# Altium PCB PCB2.PcbDoc
Units mil, origin at the board's own origin, x right, y up, seen from the top; angles counter-clockwise.
Board outline 3932.54 x 3937.16 mil, 2 copper layers (Top Layer, Bottom Layer); 48 components, 43 nets, 184 pads, 106 vias.
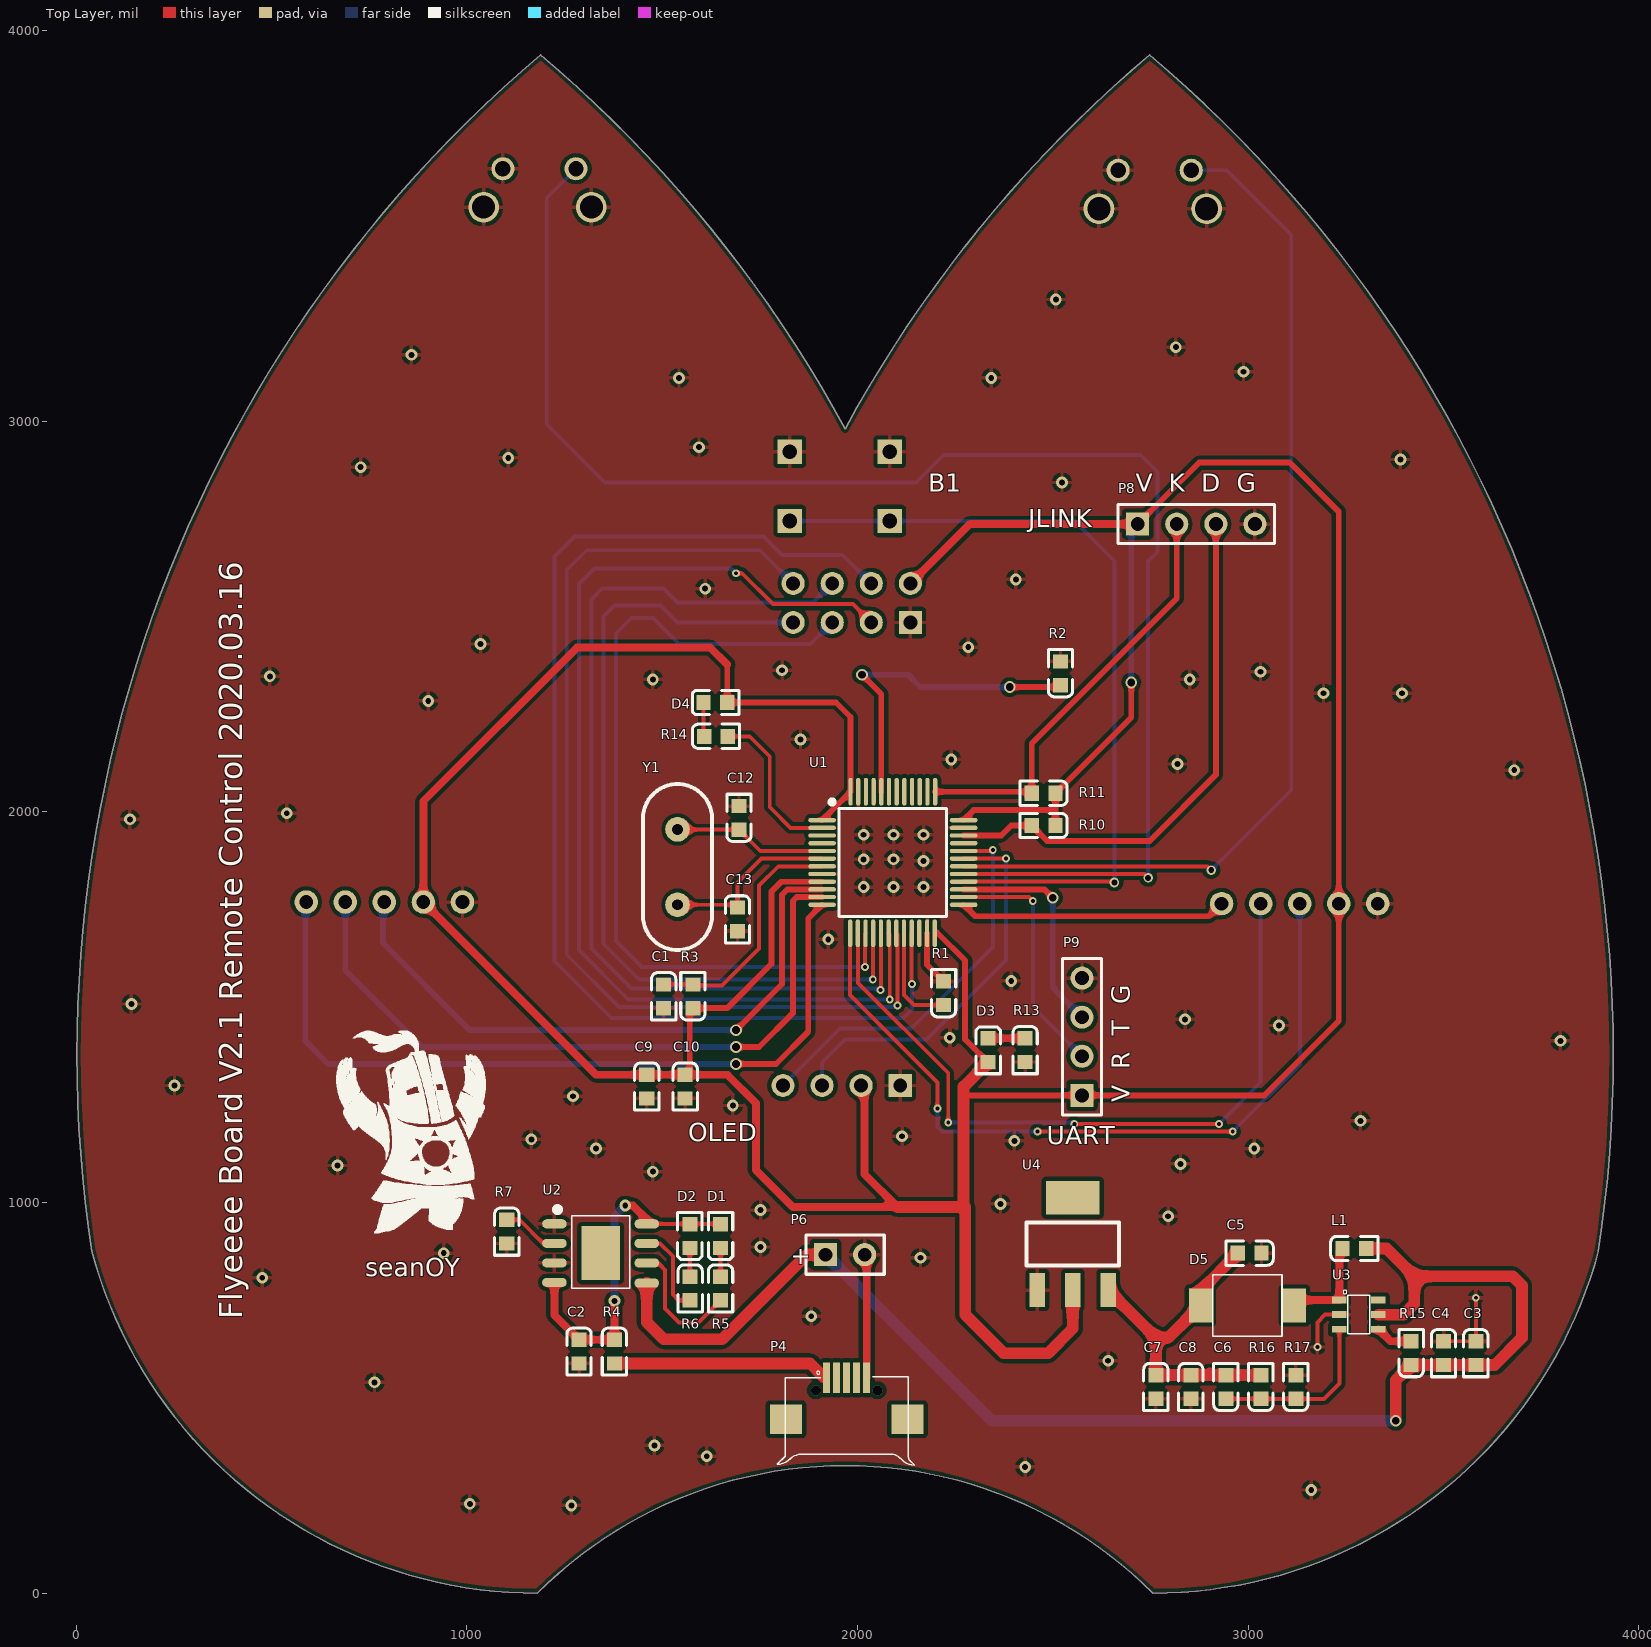
[diagram p0: Top Layer view]
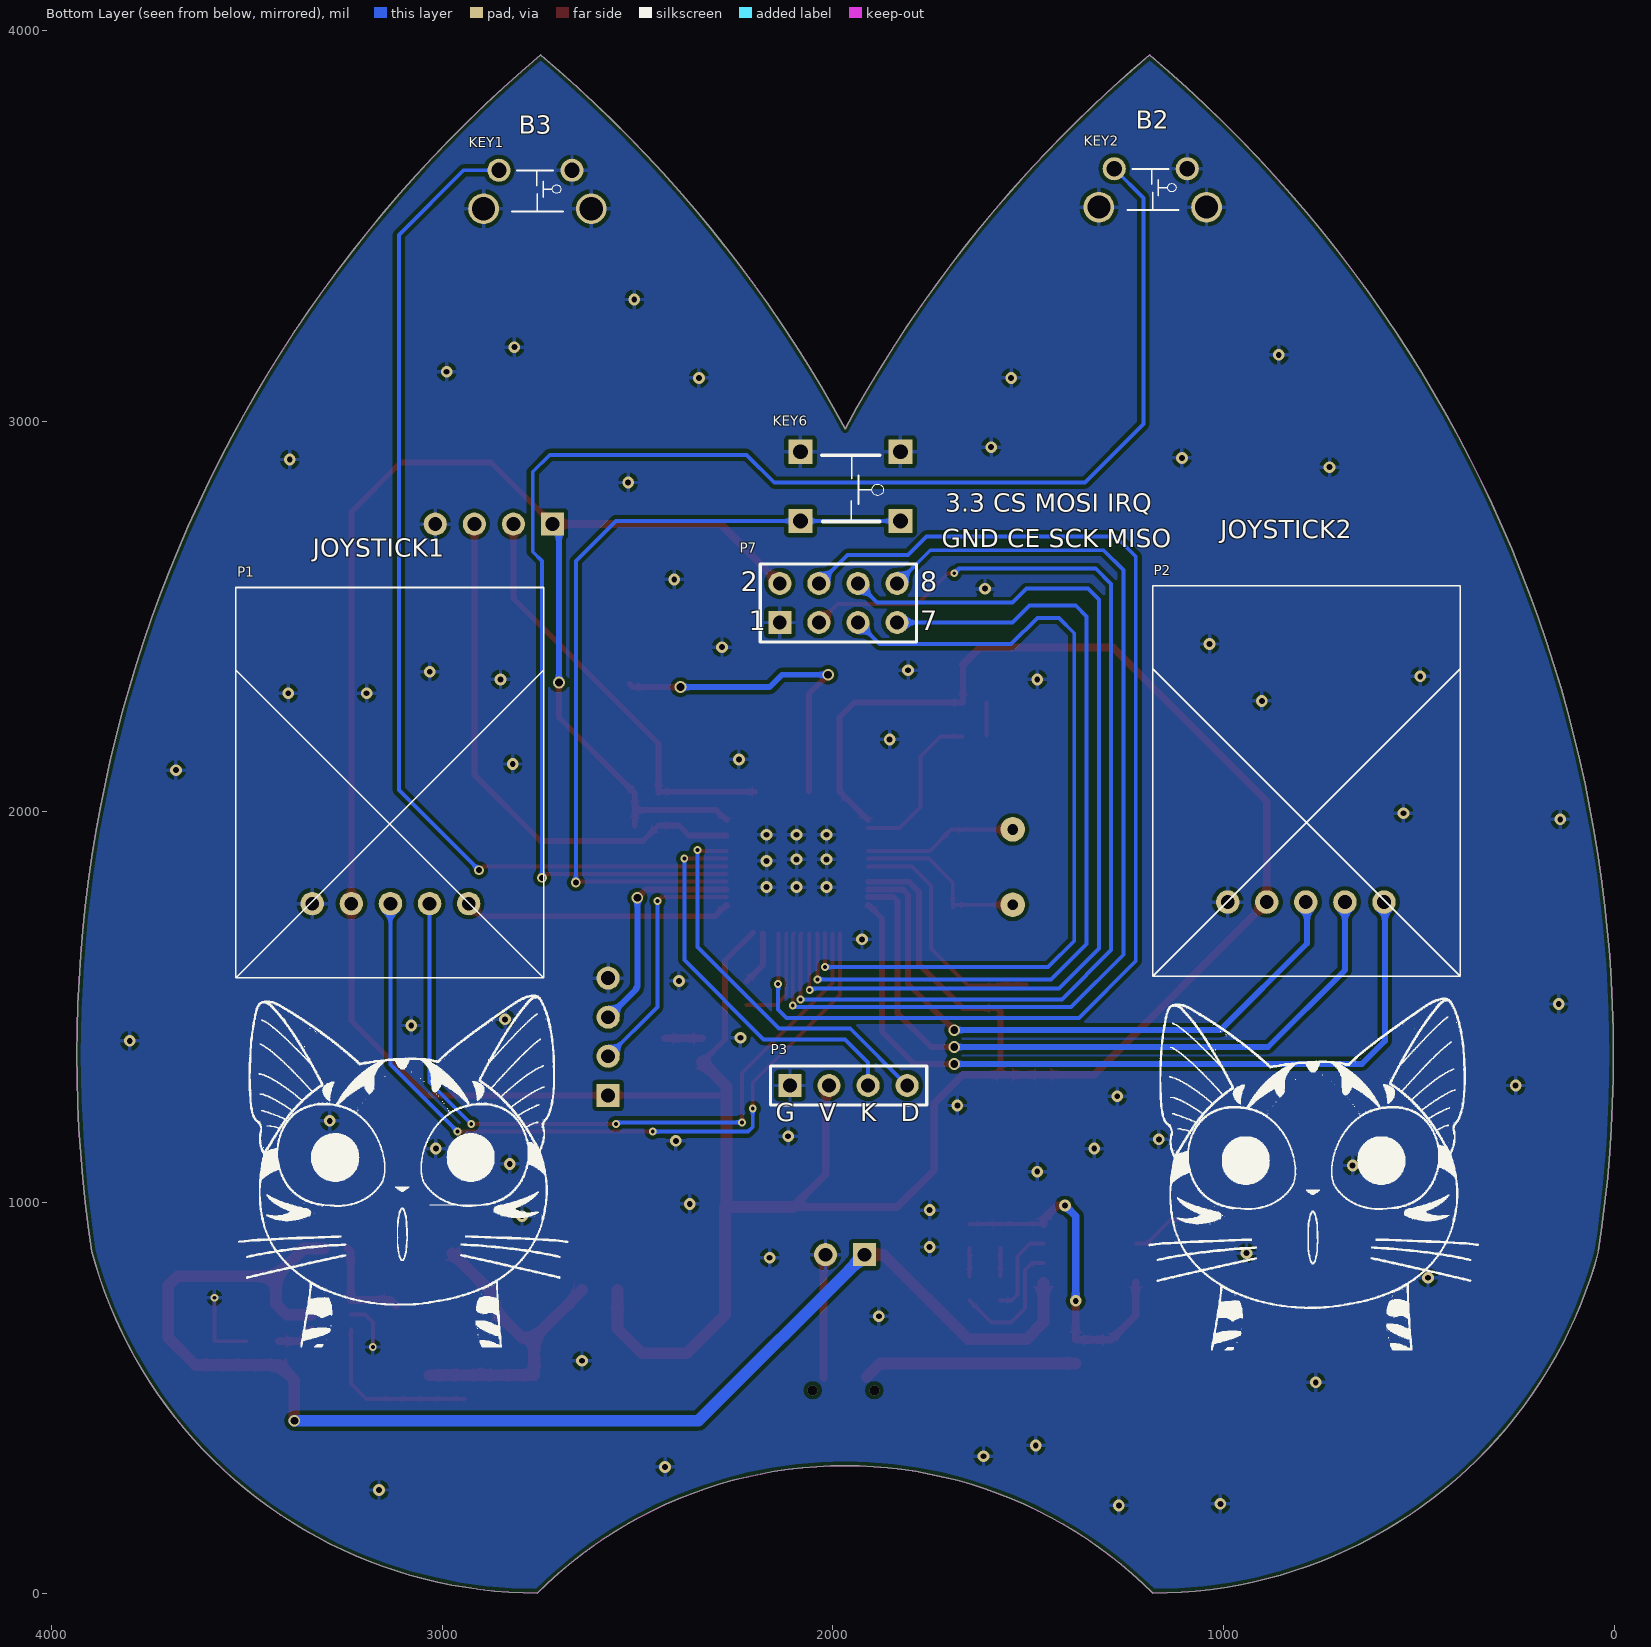
[diagram p1: Bottom Layer view, seen from below]
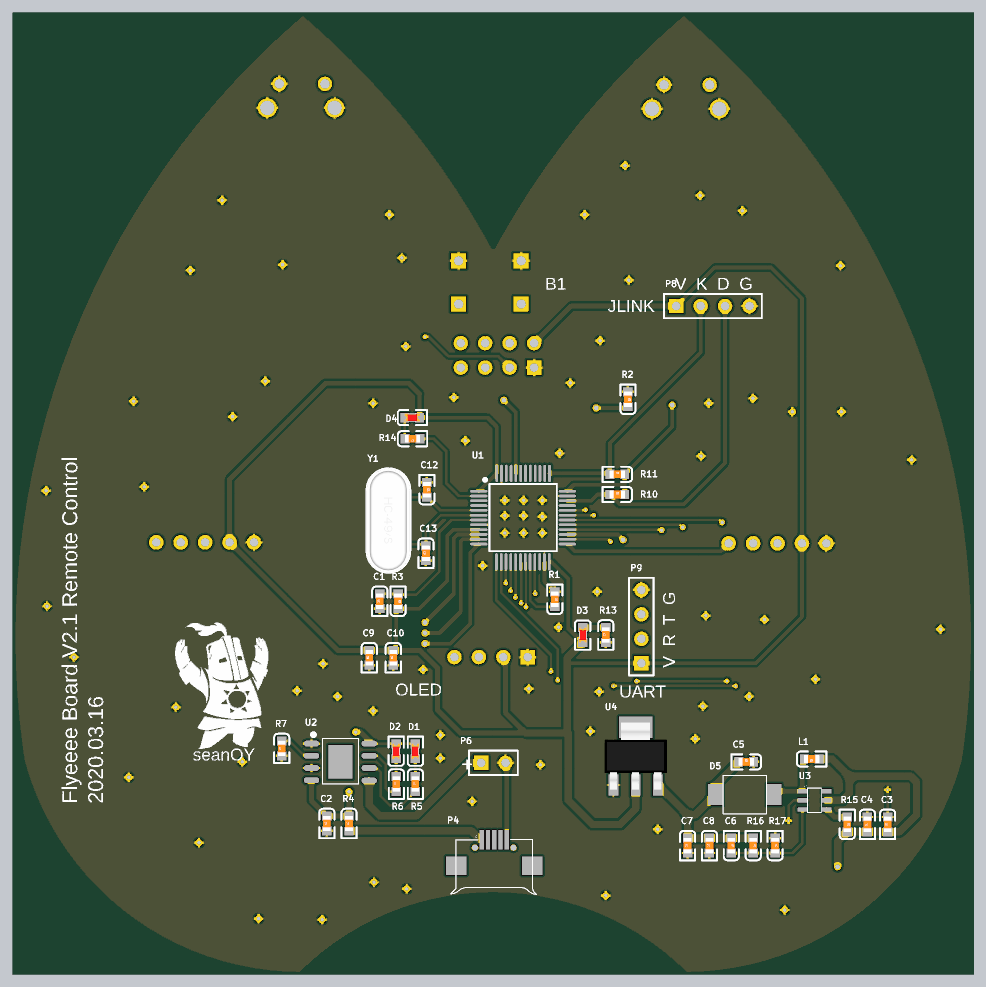
[diagram p2: 3D render of the assembled board from above, using the file's embedded part models]

## Layer stack, top to bottom
Top Solder: solder mask 0.4, Solder Resist, Dk 3.5
Top Layer: signal copper 1.4
Dielectric 1: dielectric 12.6, FR-4, Dk 4.8
Bottom Layer: signal copper 1.4
Bottom Solder: solder mask 0.4, Solder Resist, Dk 3.5

## Board outline
1180.81,-0.08 cw(c1968.4,-787.59) 2755.91,0 ccw(c2755.91,1181.1) 3896.69,875.14 ccw(c582.38,1378.03) 2747.74,3937.09 ccw(c4913.09,1378.03) 1968.32,2979.84 1968.38,2979.81 ccw(c-976.38,1377.95) 1188.98,3937.01 ccw(c3354.33,1377.95) 40.02,875.07 ccw(c1180.81,1181.02)

## Design rules (kind name [scope] priority, off if disabled: settings)
Clearance [All] p1: gap=10 ignorepadtopadclearanceinfootprint=FALSE
PolygonConnect [All] p1: connectstyle=Relief reliefconductorwidth=10 reliefentries=4 polygonreliefangle="90 Angle" airgapwidth=10
RoutingVias RoutingVias_power [InNetClass('POWER')] p1: holewidth=20 width=40 viastyle="Through Hole" minholewidth=20 minwidth=30 maxholewidth=30 maxwidth=40
RoutingVias RoutingVias_1 [All] p2: holewidth=15 width=25 viastyle="Through Hole" minholewidth=10 minwidth=20 maxholewidth=40 maxwidth=30
SolderMaskExpansion [All] p1: expansion=4
Width Width_power [InNetClass('POWER')] p1: maxlimit=30 minlimit=15 preferedwidth=20
Width Width_1 [All] p2: maxlimit=20 minlimit=10 preferedwidth=15
30 further rules are at their usual default settings.

## Components (designator, comment, footprint, x,y, rotation, side; value= is the part's Value field where it differs from the comment)
C1 "Cap" 0603 1503.94,1527.56 r90 top value=104
C2 "Cap" 0603 1287.41,618.11 r90 top value=10uF
C3 "Cap" 0603 3582.68,614.17 r90 top value=10uF
C4 "Cap2" 0603 3500,614.17 r90 top value=22UF
C5 "Cap2" 0603 3003.94,870.08 r0 top value=22UF
C6 "Cap" 0603 2942.91,527.56 r270 top value=15pF
C7 "Cap" 0603 2763.78,527.56 r90 top value=1uF
C8 "Cap" 0603 2853.35,527.56 r90 top value=104
C9 "Cap" 0603 1460.63,1296.46 r90 top value=10uF
C10 "Cap" 0603 1559.06,1296.46 r90 top value=104
C12 "Cap" 0603 1696.85,1984.25 r270 top value=22PF
C13 "Cap" 0603 1692.91,1724.41 r90 top value=22PF
D1 "绿" 0603-LED 1649.61,913.39 r90 top
D2 "红" 0603-LED 1570.87,913.39 r90 top
D3 "LED0" 0603-LED 2334.65,1389.76 r270 top
D4 "LED0" 0603-LED 1636.42,2279.53 r0 top
D5 "SS54" DO-214AA/SMB 3086.61,814.96 r180 top
KEY1 "LB" "KEY 侧式直插" 2755.91,3543.31 r0 bottom
KEY2 "RB" "KEY 侧式直插" 1181.1,3547.24 r0 bottom
KEY6 "B1" KEY_M 1826.77,2744.09 r0 bottom
L1 "Inductor Iron Dot" 0603 3271.65,881.89 r180 top value="4.7uH  4A"
P1 "Header 5" 摇杆1#1 3133.86,1968.5 r90 bottom
P2 "Header 5" 摇杆1#2 787.4,1972.44 r90 bottom
P3 "Header 4" HDR1X4 2109.45,1299.21 r180 bottom
P4 "Mirco-USB" microUSB 1972.44,551.18 r0 top
P6 "Battery" BAT-2 1968.5,866.14 r0 top
P7 "Header 4X2" HDR2X4 2135.43,2484.25 r180 bottom
P8 "Header 4" HDR1X4 2717.32,2736.22 r0 top
P9 "Header 4" HDR1X4 2574.8,1274.02 r90 top
R1 "Res2" 0603 2220.47,1535.43 r270 top value=100K
R2 "Res2" 0603 2519.68,2354.33 r270 top value=10K
R3 "Res2" 0603 1578.74,1527.56 r270 top value=4.7K
R4 "Res2" 0603 1377.95,618.11 r90 top value=0.4
R5 "Res2" 0603 1649.61,779.53 r90 top value=2K
R6 "Res2" 0603 1571.77,779.53 r90 top value=2K
R7 "Res2" 0603 1102.36,925.2 r90 top value=2K
R10 "Res2" 0603 2476.38,1964.57 r0 top value=10K
R11 "Res2" 0603 2476.38,2047.24 r0 top value=10K
R13 "Res2" 0603 2429.13,1389.76 r90 top value=1K
R14 "Res2" 0603 1637.8,2192.91 r180 top value=1K
R15 "Res2" 0603 3417.32,614.17 r270 top value=100k
R16 "Res2" 0603 3032.48,527.56 r270 top value=191K
R17 "Res2" 0603 3122.05,527.56 r270 top value=10K
U1 "STM32F103C8T6" LQFP-48 2090.55,1870.08 r0 top locked
U2 "TP4056" SOIC-8/SOP-8 1224.41,945.08 r0 top
U3 "SX1308" sot-23-6 3283.46,712.6 r90 top
U4 "AMS1117-3.3" SOT-223 2551.18,893.7 r270 top
Y1 "8MHz" LC-HC-49S 1539.37,1858.27 r270 top

## Footprints (in the part's own frame and the unit in brackets; to place one, negate y for a bottom-side part, rotate by r counter-clockwise, add the part's x,y. Pads: shape width x height; smd on the part's side, far side on the other; paste and mask are expansions set on the pad)
0603 [mm]
  rect 0.93x0.98 smd: 1(-0.77,0) 2(0.77,0)
  silkscreen extent -1.53,-0.79 1.54,0.79, body extent -0.8,-0.4 0.8,0.4, height 0.3
0603-LED [mm]
  rect 0.93x0.98 smd: 1(0.77,0) 2(-0.77,0)
  silkscreen extent -1.5,-0.79 1.53,0.79, body extent -0.8,-0.4 0.8,0.4, height 0.6
BAT-2 [mm]
  rect 1.5x1.5 hole 0.9: 1(-1.27,0)
  round 1.5 hole 0.9: 2(1.27,0)
  silkscreen extent -2.54,-1.27 2.54,1.27
DO-214AA/SMB [mm]
  rect 1.5x2.2 smd: 1(-0.8,2) 2(5.3,2)
  silkscreen extent 0,0 4.5,4
HDR1X4 [mm] "Connector; Header; 4 Position"
  rect 1.5x1.5 hole 0.9: 1(0,0)
  round 1.5 hole 0.9: 2(2.54,0) 3(5.08,0) 4(7.62,0)
  silkscreen extent -1.27,-1.27 8.89,1.27
HDR2X4 [mm] "Connector; Header; 4x2 Position"
  rect 1.5x1.5 hole 0.9: 1(0,0)
  round 1.5 hole 0.9: 2(0,2.54) 3(2.54,0) 4(2.54,2.54) 5(5.08,0) 6(5.08,2.54) 7(7.62,0) 8(7.62,2.54)
  silkscreen extent -1.27,-1.27 8.89,3.81
"KEY 侧式直插" [mm] "按键 贴片 侧式"
  round 2 hole 1.5: 1(-3.5,0) 1(3.5,0)
  round 1.5 hole 1: 2(-2.25,-2.5) 2(2.5,-2.5)
  silkscreen extent -1.68,-2.47 1.65,0.18
KEY_M [mil]
  rect 62x62 hole 38: 1(0,0) 1(255.91,0) 2(0,-177.17) 2(255.91,-177.17)
  silkscreen extent 43,-168 201,1
LC-HC-49S [mm]
  round 1.6 hole 0.7: 1(-2.45,0) 2(2.45,0)
  silkscreen extent -5.39,-2.25 5.39,2.25, body extent -5.39,-2.27 5.41,2.23, height 3.6
LQFP-48 [mm]
  oval 1.8x0.28 smd mask+0.051: 1(-4.6,2.75) 2(-4.6,2.25) 3(-4.6,1.75) 4(-4.6,1.25) 5(-4.6,0.75) 6(-4.6,0.25) 7(-4.6,-0.25) 8(-4.6,-0.75) 9(-4.6,-1.25) 10(-4.6,-1.75) 11(-4.6,-2.25) 12(-4.6,-2.75) 25(4.6,0.75) 26(4.6,0.25) 27(4.6,-0.25) 28(4.6,-0.75) 29(4.6,-1.25) 30(4.6,-1.75) 31(4.6,-2.25) 32(4.6,-2.75) 33(4.6,1.25) 34(4.6,1.75) 35(4.6,2.25) 36(4.6,2.75)
  oval 0.28x1.8 smd mask+0.051: 13(-2.775,-4.6) 14(-2.275,-4.6) 15(-1.775,-4.6) 16(-1.275,-4.6) 17(-0.775,-4.6) 18(-0.275,-4.6) 19(0.225,-4.6) 20(0.725,-4.6) 21(1.225,-4.6) 22(1.725,-4.6) 23(2.225,-4.6) 24(2.725,-4.6) 37(2.75,4.6) 38(2.25,4.6) 39(1.75,4.6) 40(1.25,4.6) 41(0.75,4.6) 42(0.25,4.6) 43(-0.25,4.6) 44(-0.75,4.6) 45(-1.25,4.6) 46(-1.75,4.6) 47(-2.25,4.6) 48(-2.75,4.6)
  silkscreen extent -4.1,-3.5 3.5,4.07
microUSB [mm]
  rect 0.45x2 smd: 1(-1.3,0) 2(-0.65,0) 3(0,0) 4(0.65,0) 5(1.3,0)
  rect 2.1x1.9 smd: ""(-3.95,-2.7) ""(3.95,-2.7)
  silkscreen extent -4.52,-5.68 4.4,0.43
SOIC-8/SOP-8 [mm]
  oval 1.6x0.6 smd: 1(0,0) 2(0,-1.27) 3(0,-2.54) 4(0,-3.81) 5(6,-3.85) 6(6,-2.54) 7(6,-1.27) 8(6,0)
  rect 2.5x3.5 smd: 9(3,-1.905)
  silkscreen extent 0.02,-4.2 4.9,1.1
sot-23-6 [mm]
  rect 0.45x0.95 smd: 1(0.95,1.27) 2(0,1.27) 3(-0.95,1.27) 4(-0.95,-1.27) 5(0,-1.27) 6(0.95,-1.27)
  silkscreen extent -1.25,-0.7 1.6,1.02
SOT-223 [mm]
  rect 2.2x1 smd: 1(3,-2.3) 2(3,0) 3(3,2.3)
  rect 2.2x3.5 smd: ""(-3,0)
  silkscreen extent -1.4,-3 1.4,3, body extent -3.49,-3.24 3.49,3.24, height 1.64
摇杆1#1 [mil]
  round 60 hole 35: 1(-203.74,198.14) 2(-203.74,98.14) 3(-203.74,-1.86) 4(-203.74,-101.86) 5(-203.74,-201.86)
  silkscreen extent -394,-394 605,394
摇杆1#2 [mil]
  round 60 hole 35: 1(-203.74,201.6) 2(-203.74,101.6) 3(-203.74,1.6) 4(-203.74,-98.4) 5(-203.74,-198.4)
  silkscreen extent -394,-394 605,394

## Part data
C1 C2 C3 C4 C5 C6 C7 C8 C9 C10 C12 C13: "Capacitor", Publisher="Altium Limited"
  C1 C2 C3 C6 C7 C8 C9 C10 C12 C13: LatestRevisionDate=17-Jul-2002, LatestRevisionNote="Re-released for DXP Platform.", PackageDescription="Radial Cap, Thru-Hole; 2 Leads; 0.3 in Pin Spacing", PackageReference=RAD-0.3, Published=8-Jun-2000
  C4 C5: PackageDescription="Capacitor; 2 Leads", PackageReference=CAPR5-4X5, Published=23-Sep-2002
D1 D2: library part LED0, "Typical INFRARED GaAs LED", LatestRevisionDate=08-Jul-2005, LatestRevisionNote="Mech Layer 1 removed.", PackageDescription="LED; 2 Leads", PackageReference=LED-0, Published=8-Jun-2000, Publisher="Altium Limited"
D3 D4: "Typical INFRARED GaAs LED", LatestRevisionDate=08-Jul-2005, LatestRevisionNote="Mech Layer 1 removed.", PackageDescription="LED; 2 Leads", PackageReference=LED-0, Published=8-Jun-2000, Publisher="Altium Limited"
D5: library part Diode, "Default Diode", Code_JEDEC=DO-214-AB, LatestRevisionDate=17-Jul-2002, LatestRevisionNote="Re-released for DXP Platform.", PackageDescription="DO-214-AB/SMC; 2 C-Bend Leads; Body 7.9 x 5.9 mm, inc. leads (LxW)", PackageReference=SMC, PackageVersion=Sep-1996, Published=8-Jun-2000, Publisher="Altium Limited"
KEY1 KEY2 KEY6: library part KEY
L1: "Magnetic-Core Inductor with Winding Polarity Marking", LatestRevisionDate=17-Jul-2002, LatestRevisionNote="Re-released for DXP Platform.", PackageDescription="Diode; 2 Leads", PackageReference=DIODE_SMC, Published=24-Mar-1999, Publisher="Altium Limited"
P1 P2: "Header, 5-Pin", LatestRevisionDate=17-Jul-2002, LatestRevisionNote="Re-released for DXP Platform.", Publisher="Altium Limited"
P3 P8 P9: "Header, 4-Pin", LatestRevisionDate=17-Jul-2002, LatestRevisionNote="Re-released for DXP Platform.", Publisher="Altium Limited"
P4: "USB"
P6: library part "Header 2", "Header, 2-Pin", LatestRevisionDate=17-Jul-2002, LatestRevisionNote="Re-released for DXP Platform.", Publisher="Altium Limited"
P7: "Header, 4-Pin, Dual row", LatestRevisionDate=17-Jul-2002, LatestRevisionNote="Re-released for DXP Platform.", Publisher="Altium Limited"
R1 R2 R3 R4 R5 R6 R7 R10 R11 R13 R14 R15 R16 R17: "Resistor", LatestRevisionDate=17-Jul-2002, LatestRevisionNote="Re-released for DXP Platform.", PackageDescription="Axial Device, Thru-Hole; 2 Leads; 0.4 in Pin Spacing", PackageReference=AXIAL-0.4, Published=8-Jun-2000, Publisher="Altium Limited"
U1: "ST MCU"
U2: "Battery Charge IC"
U4: "5V->3.3V"
Y1: library part XTAL, "Crystal Oscillator", LatestRevisionDate=17-Jul-2002, LatestRevisionNote="Re-released for DXP Platform.", PackageDescription="Crystal, Thru-Hole; 2 Leads; Body 3.1 x 8.2 mm (Dia.xH)", PackageReference=R38, Published=8-Jun-2000, Publisher="Altium Limited"

## Via types
v1: diameter 30, hole 15, Top Layer to Bottom Layer, 75 vias
v2: diameter 20, hole 10, Top Layer to Bottom Layer, 18 vias
v3: diameter 30, hole 20, Top Layer to Bottom Layer, 8 vias
v4: diameter 25, hole 15, Top Layer to Bottom Layer, 3 vias
v5: diameter 25.59, hole 25.59, Top Layer to Bottom Layer, 2 vias

## Nets (pads, with @x,y where several pads share a name; then routed paths per layer and width w, separated by ;. In a path a pad name is that pad's centre, name@x,y a point inside that pad or via, vN(x,y) a via of type N, cw(c..) or ccw(c..) an arc to the next point about the centre after c; other vN are vias at no path point)
3.3V: C9.2 C10.2 D3.1 D4.1 P1.2 P2.2 P3.2 P7.2 P8.1 P9.1 R3.2 R10.2 R11.2 U1.1 U1.9 U1.24 U1.36 U1.48 U4.2 | length 11064.9
  Top Layer w15: C10.2 1570.87,1338.58 1570.87,1489.37 R3.2 1666.54,1497.24 1779.53,1610.24 1779.53,1795.28 1805.12,1820.87 U1.9 ; 1666.73,2376.58 D4.1 1944.88,2279.53 1982.28,2242.13 U1.48 U1.1 ; 2203.6,1690.95 2275.59,1618.95 2275.59,1416.79 2332.93,1359.45 D3.1 ; U1.36 2297.24,2003.94 2506.69,2003.94 ; 2285.83,1274.02 P9.1 3041.73,1274.02 3232,1464.28 P1.2 3232,2768 3106.3,2893.7 2874.8,2893.7 P8.1 ; R10.2 2506.69,2003.94 ; v3(2700.79,2330.71) 2700.79,2241.34 R11.2 2506.69,2003.94
  Top Layer w20: 1666.73,2376.58 1623.43,2419.88 1282.09,2419.88 889,2026.8 P2.2 1330.93,1326.77 C9.2 C10.2 1667.03,1326.77 1740.16,1253.65 1740.16,1082.68 1834.65,988.19 2102.36,988.19 2018.11,1072.44 P3.2@2018.11,1299.21 ; P7.2 2287.4,2736.22 P8.1
  Top Layer w30: 2102.36,988.19 2275.59,988.19 2275.59,712.6 2374.02,614.17 2488.19,614.17 2551.18,677.17 U4.2 ; 2271.65,980.32 2271.65,1296.46 D3.1
  Bottom Layer w15: v3(2700.79,2330.71) 2700.79,2719.69 P8.1
5V: C5.1 C6.1 C7.2 C8.2 D5.2 R16.1 U4.3 | length 864.4
  Top Layer w30: U4.3 2763.78,653.54 ; 2901.57,561.81 2905.51,557.87 ; C5.1 2877.95,774.41 D5.2 2795.28,653.54 2763.78,653.54 ; R16.1 C6.1 2905.51,557.87 ; 2763.78,653.54 C7.2 2905.51,557.87
GND: C1.1 C2.1 C3.2 C4.2 C5.2 C7.1 C8.1 C9.1 C10.1 C12.1 C13.1 KEY1.1 KEY1.2@2667.32,3641.73 KEY2.1 KEY2.2@1092.52,3645.67 KEY6.2 P1.1 P2.1 P3.1 P4.5 P6.2 P7.1 P8.4 P9.4 R1.1 R2.1 R7.1 R13.1 R17.1 U1.8 U1.23 U1.35 U1.47 U2.1 U2.3 U3.2 U4.1 | length 779.4
  Top Layer w10: v2(3177.17,629.92) 3177.17,692.91 3196.85,712.6 U3.2 ; C4.2 C3.2 v2(3582.68,755.91)
  Top Layer w15: U1.23 2178.15,1608.07 R1.1
  Top Layer w20: P6.2 2023.62,861.02 P4.5
  other v1: 1267.72,224.41 1007.87,228.35 3161.42,263.78 2429.13,322.83 1614.17,350.39 1480.31,377.95 763.78,539.37 2641.73,594.49 1881.89,708.66 476.38,807.09 2161.42,858.27 940.94,870.08 1751.97,885.83 2795.28,964.57 1751.97,980.32 2366.14,996.06 1476.38,1078.74 669.29,1094.49 2826.77,1098.43 1330.71,1137.8 3015.75,1137.8 2401.57,1157.48 1165.35,1161.42 2114.17,1169.29 3287.4,1208.66 1681.1,1248.03 1271.65,1271.65 251.97,1299.21 3799.21,1413.39 2236.22,1421.26 3078.74,1452.76 2838.58,1468.5 141.73,1507.87 2393.7,1566.93 1925.2,1673.23 2015.75,1807.09 2092.52,1807.09 2169.29,1807.09 2169.29,1874.02 2015.75,1877.95 2092.52,1877.95 2015.75,1940.94 2092.52,1940.94 2169.29,1940.94 137.8,1980.32 539.37,1996.06 3681.1,2106.3 2818.9,2122.05 2240.16,2133.86 1854.33,2185.04 901.57,2283.46 3192.91,2303.15 3393.7,2303.15 1476.38,2338.58 2850.39,2338.58 496.06,2346.46 3031.5,2358.27 1807.09,2362.2 2283.46,2421.26 1035.43,2429.13 1610.24,2570.87 2405.51,2594.49 2523.62,2842.52 728.35,2881.89 3389.76,2901.57 1106.3,2905.51 1594.49,2933.07 1543.31,3110.24 2342.52,3110.24 2988.19,3125.98 858.27,3169.29 2814.96,3188.98 2507.87,3311.02
JTCK: P8.2 R11.1 U1.37 | length 1091.6
  Top Layer w15: U1.37 2442.13,2051.18 R11.1 2446.06,2174.41 2817.32,2545.67 P8.2
JTMS: P8.3 R10.1 U1.34 | length 1384.4
  Top Layer w15: U1.34 2368.11,1938.98 2393.7,1964.57 R10.1 2485.43,1925.2 2748.03,1925.2 2917.32,2094.49 P8.3
KEY_B_1: KEY6.1 U1.29 | length 2086.5
  Top Layer w10: U1.29 2659.45,1820.87 v4(2657.48,1818.9)
  Bottom Layer w10: KEY6.1@1826.77,2744.09 2082.68,2744.09 2555.12,2744.09 2657.48,2641.73 v4(2657.48,1818.9)
KEY_H_1: KEY1.2@2854.33,3641.73 U1.27 | length 2673.1
  Top Layer w10: U1.27 2895.67,1860.24 v4(2905.51,1850.39)
  Bottom Layer w10: KEY1.2@2854.33,3641.73 2944.88,3641.73 3110.24,3476.38 3110.24,2055.12 v4(2905.51,1850.39)
KEY_H_2: KEY2.2@1279.53,3645.67 U1.28 | length 3882.5
  Top Layer w10: U1.28 2734.25,1840.55 v4(2744.09,1830.71)
  Bottom Layer w10: KEY2.2@1279.53,3645.67 1204.72,3570.87 1204.72,2992.13 1354.33,2842.52 2149.61,2842.52 2220.47,2913.39 2724.41,2913.39 2767.72,2870.08 2767.72,2665.35 2744.09,2641.73 v4(2744.09,1830.71)
NetC1_2: C1.2 R3.1 U1.7 | length 634.3
  Top Layer w10: C1.2 R3.1 ; R3.1@1570.87,1555.12 1653.54,1555.12 1748.03,1649.61 1748.03,1811.02 1797.24,1860.24 U1.7
NetC2_2: C2.2 D1.1 D2.1 R4.2 U2.4 U2.8 | length 889.4
  Top Layer w10: U2.8 1648.23,945.08 D1.1
  Top Layer w20: U2.4 1224.41,711.42 C2.2 R4.2 v1(1377.95,748.03) ; v1(1405.51,992.13) 1425.2,992.13 1460.63,956.69 U2.8
  Bottom Layer w20: v1(1377.95,748.03) 1377.95,964.57 v1(1405.51,992.13)
NetC6_2: C6.2 R16.2 R17.2 U3.3 | length 445.4
  Top Layer w10: C6.2 R16.2 R17.2 3194.09,497.24 3233.46,536.61 U3.3
NetD1_2: D1.2 R5.2 | length 73.2
  Top Layer w10: R5.2 D1.2
NetD2_2: D2.2 R6.2 | length 72.3
  Top Layer w10: R6.2@1570.87,810.75 D2.2
NetD3_2: D3.2 R13.2 | length 94.5
  Top Layer w20: D3.2 R13.2
NetD4_2: D4.2 R14.2 | length 85.2
  Top Layer w10: R14.2@1606.1,2194.29 D4.2
NetD5_1: D5.1 L1.2 U3.1 | length 256.2
  Top Layer w20: D5.1 3131.89,750 U3.1 3233.46,874.02 L1.2
NetR1_2: R1.2 U1.20 | length 270.4
  Top Layer w10: U1.20 2119.09,1530.51 2144.49,1505.12 R1.2
NetR2_2: R2.2 U1.44 | length 843.8
  Top Layer w15: v3(2011.81,2350.39) 2061.02,2301.18 U1.44 ; v3(2389.76,2318.9) 2511.81,2318.9 R2.2@2519.68,2326.77
  Bottom Layer w15: v3(2011.81,2350.39) 2129.92,2350.39 2161.42,2318.9 v3(2389.76,2318.9)
NetR5_1: R5.1 U2.6 | length 333
  Top Layer w10: U2.6 1489.57,845.08 1507.56,827.09 1507.56,728.66 1543.31,692.91 1593.31,692.91 R5.1
NetR6_1: R6.1 U2.7 | length 229.2
  Top Layer w10: U2.7 1494.68,895.08 1527.56,862.2 1527.56,763.78 1542.13,749.21 R6.1
NetR7_2: R7.2 U2.2 | length 147.1
  Top Layer w10: R7.2 1135.04,955.51 1195.47,895.08 U2.2
NetR15_1: R15.1 U3.4 | length 96.6
  Top Layer w20: U3.4 3364.17,644.49 R15.1
NRF_CE: P7.3 U1.18 | length 2776.4
  Top Layer w10: v2(1688.98,2610.24) 1704.72,2610.24 1783.46,2531.5 1988.19,2531.5 P7.3 ; U1.18 2082.68,1686.02 v2(2082.68,1519.68)
  Bottom Layer w10: v2(1688.98,2610.24) 1677.17,2622.05 1326.77,2622.05 1287.4,2582.68 1287.4,1645.67 1413.39,1519.68 v2(2082.68,1519.68)
NRF_IRQ: P7.8 U1.19 | length 2710
  Top Layer w10: U1.19 2102.36,1686.02 v2(2102.36,1503.93)
  Bottom Layer w10: P7.8 1750.39,2669.29 1307.09,2669.29 1255.91,2618.11 1255.91,1633.86 1389.76,1500 2098.42,1500 v2(2102.36,1503.93)
OSC_IN: C12.2 U1.5 Y1.1 | length 392.9
  Top Layer w10: Y1.1 1540.16,1953.94 C12.2 1751.18,1899.61 U1.5
OSC_OUT: C13.2 U1.6 Y1.2 | length 462.5
  Top Layer w10: Y1.2 1685.83,1761.81 C13.2 1692.91,1818.9 1753.94,1879.92 U1.6
PC13: R14.1 U1.2 | length 414.5
  Top Layer w10: R14.1 1724.41,2192.91 1775.59,2141.73 1775.59,2011.81 1828.74,1958.66 U1.2
RXD: P9.2 U1.31 | length 631.1
  Top Layer w10: U1.31 2438.98,1781.5 v2(2448.82,1771.65)
  Bottom Layer w10: v2(2448.82,1771.65) 2448.82,1500 P9.2
SCL: P3.3 U1.26 | length 1006.1
  Top Layer w10: U1.26 v2(2379.92,1879.92)
  Bottom Layer w10: P3.3 1909.45,1358.27 1968.5,1417.32 2177.17,1417.32 2379.92,1620.08 v2(2379.92,1879.92)
SDA: P3.4 U1.25 | length 1007.4
  Top Layer w10: U1.25 2344.49,1899.61 v2(2346.46,1901.57)
  Bottom Layer w10: P3.4 1955.12,1444.88 2137.8,1444.88 2346.46,1653.54 v2(2346.46,1901.57)
SPI_CSN: P7.4 U1.21 | length 3097.5
  Top Layer w10: U1.21 2138.78,1560.04 v2(2139.76,1559.06)
  Bottom Layer w10: P7.4 1962.2,2657.48 1807.09,2657.48 1759.84,2704.72 1275.59,2704.72 1224.41,2653.54 1224.41,1618.11 1370.08,1472.44 2118.11,1472.44 2139.76,1494.09 v2(2139.76,1559.06)
SPI_MISO: P7.7 U1.16 | length 2198
  Top Layer w10: v2(2039.37,1570.87) 2039.37,1687.99 U1.16
  Bottom Layer w10: P7.7 1539.37,2484.25 1496.06,2527.56 1377.95,2527.56 1350.39,2500 1350.39,1661.42 1440.94,1570.87 v2(2039.37,1570.87)
SPI_MOSI: P7.6 U1.17 | length 2486.8
  Top Layer w10: v2(2059.06,1543.31) 2060.04,1544.29 U1.17
  Bottom Layer w10: P7.6 1886.61,2535.43 1539.37,2535.43 1503.94,2570.87 1346.46,2570.87 1318.9,2543.31 1318.9,1649.61 1421.26,1547.24 2055.12,1547.24 v2(2059.06,1543.31)
SPI_SCK: P7.5 U1.15 | length 2160.3
  Top Layer w10: v2(2019.68,1602.36) 2019.68,1687.99 U1.15
  Bottom Layer w10: P7.5 1880.31,2429.13 1543.31,2429.13 1476.38,2496.06 1421.26,2496.06 1381.89,2456.69 1381.89,1669.29 1448.82,1602.36 v2(2019.68,1602.36)
SW1: P1.5 U1.32 | length 686
  Top Layer w15: U1.32 2301.18,1732.28 2899.52,1732.28 P1.5
SW2: P2.5 U1.12 | length 2040.9
  Top Layer w15: v3(1688.97,1354.33) 1791.34,1354.33 1874.02,1437.01 1874.02,1726.38 U1.12
  Bottom Layer w15: P2.5@586.61,1768.7 586.61,1413.39 645.67,1354.33 v3(1688.97,1354.33)
TXD: P9.3 U1.30 | length 575.4
  Top Layer w15: U1.30 2478.35,1801.18 v3(2500,1779.53)
  Bottom Layer w15: v3(2500,1779.53) 2500,1552.76 2503.94,1548.82 2501.97,1546.85 P9.3
VBAT+: C3.1 C4.1 L1.1 P6.1 R15.2 U2.5 U3.5 | length 3519
  Top Layer w30: U2.5 1460.63,692.91 1503.94,649.61 1653.54,649.61 1870.08,866.14 P6.1 ; L1.1 3354.33,881.89 3425.2,811.02 ; U3.5 3397.64,712.6 3425.2,740.16 3425.2,811.02 ; v3(3377.95,440.94) 3377.95,544.49 R15.2 C3.1 3631.1,583.86 3700.79,653.54 3700.79,787.4 3677.17,811.02 3425.2,811.02
  Bottom Layer w30: P6.1 2343.7,440.94 v3(3377.95,440.94)
VBUS: P4.1 R4.1 | length 549.3
  Top Layer w30: R4.1 1878.49,587.8 P4.1@1912.99,553.29
VRX1: P1.3 U1.13 | length 2004.2
  Top Layer w10: U1.13 1981.3,1530.51 2204.72,1307.09 v2(2204.72,1240.16) ; v2(2460.63,1181.1) v2(2960.63,1181.1)
  Bottom Layer w10: v2(2204.72,1240.16) 2204.72,1192.91 2216.54,1181.1 v2(2460.63,1181.1) ; v2(2960.63,1181.1) 3132.38,1352.85 P1.3@3132.38,1764.76
VRX2: P2.3 U1.10 | length 1604.2
  Top Layer w15: v3(1688.98,1440.94) 1807.09,1559.06 1807.09,1787.4 1820.87,1801.18 U1.10
  Bottom Layer w15: P2.3@785.93,1768.7 785.93,1662.89 1007.87,1440.94 v3(1688.98,1440.94)
VRY1: P1.4 U1.14 | length 1882.8
  Top Layer w10: U1.14 2000.98,1562.01 2232.28,1330.71 v2(2232.28,1204.72) ; v2(2555.12,1200.79) v2(2925.2,1200.79)
  Bottom Layer w10: v2(2232.28,1204.72) 2551.18,1204.72 v2(2555.12,1200.79) ; v2(2925.2,1200.79) 3032,1307.59 P1.4
VRY2: P2.4 U1.11 | length 1803.6
  Top Layer w15: v3(1688.98,1397.64) 1748.03,1397.64 1834.65,1484.25 1834.65,1771.65 1844.49,1781.5 U1.11
  Bottom Layer w15: P2.4 689,1594.46 885.83,1397.64 v3(1688.98,1397.64)
pads on no net: P4. P4.2 P4.3 P4.4 U1.3 U1.4 U1.22 U1.33 U1.38 U1.39 U1.40 U1.41 U1.42 U1.43 U1.45 U1.46 U2.9 U3.6 U4.
copper on no net:
  other v5: 1893.7,519.13 2051.18,519.13

## Polygon pours and split planes (outlines as drawn)
GND on Top Layer "Keep-Out Layer-No Net" (solid, remove dead copper, pour order 60): -169.29,-322.83 -70.87,-224.41 4877.95,-224.41 4877.95,3881.89 4279.53,4480.32 -98.43,4480.32
GND on Bottom Layer "Keep-Out Layer-No Net" (solid, remove dead copper, pour order 58): -70.87,-251.97 5342.52,-251.97 5555.12,-39.37 4181.1,1334.65 4181.1,4708.66 98.43,4708.66 -141.73,4468.5

## Keep-outs
Keep-Out Layer:
  lines w1: 1968.32,2979.84 cw(c4913.09,1378.03) 2747.74,3937.09 cw(c582.38,1378.03) 3896.69,875.14 cw(c2755.91,1181.1) 2755.91,0 ccw(c1968.4,-787.59) 1180.81,-0.08 cw(c1180.81,1181.02) 40.02,875.07 cw(c3354.33,1377.95) 1188.98,3937.01 cw(c-976.38,1377.95) 1968.38,2979.81

## Silkscreen, mask and mechanical layers (free items; w line width, h text height)
Top Overlay:
  drawing of 2077 lines, arcs and shapes, not listed
  text "B1" at 2181.1,2803.15 h80
  text "V  K  D  G" at 2712.6,2803.15 h80
  text "JLINK" at 2437.01,2712.6 h80
  text "V  R  T  G" at 2712.6,1255.91 h80 r90
  text "OLED" at 1566.93,1141.73 h80
  text "UART" at 2484.25,1133.86 h80
  text "seanOY" at 740.16,795.28 h80
  text "Flyeeee Board V2.1 Remote Control 2020.03.16" at 444.88,700.79 h100 r90
Bottom Overlay:
  drawing of 12290 lines, arcs and shapes, not listed
  text "B2" at 1224.41,3732.28 h80
  text "B3" at 2803.15,3720.47 h80
  text "3.3 CS MOSI IRQ" at 1712.6,2751.97 h80
  text "JOYSTICK2" at 1007.87,2685.04 h80
  text "GND CE SCK MISO" at 1720.47,2661.42 h80
  text "JOYSTICK1" at 3330.71,2637.8 h80
  text "G   V   K   D" at 2145.67,1192.91 h80

## Text inside footprints (layer, text, board x,y; h text height)
P6: Top Overlay "+" at 1829.5,842.14 h45.28
P7: Bottom Overlay "8" at 1775.43,2564.25 h50; Bottom Overlay "7" at 1775.43,2464.25 h50; Bottom Overlay "1" at 2215.43,2464.25 h50; Bottom Overlay "2" at 2235.43,2564.25 h50